# EAGLE board mainfin (EAGLE 7.4.0)
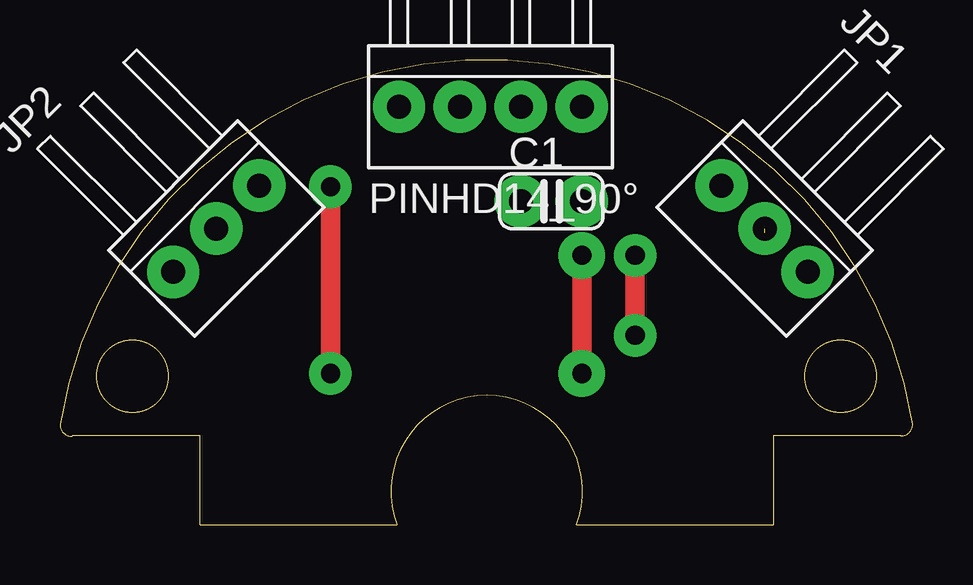
[diagram p0: board, top side]
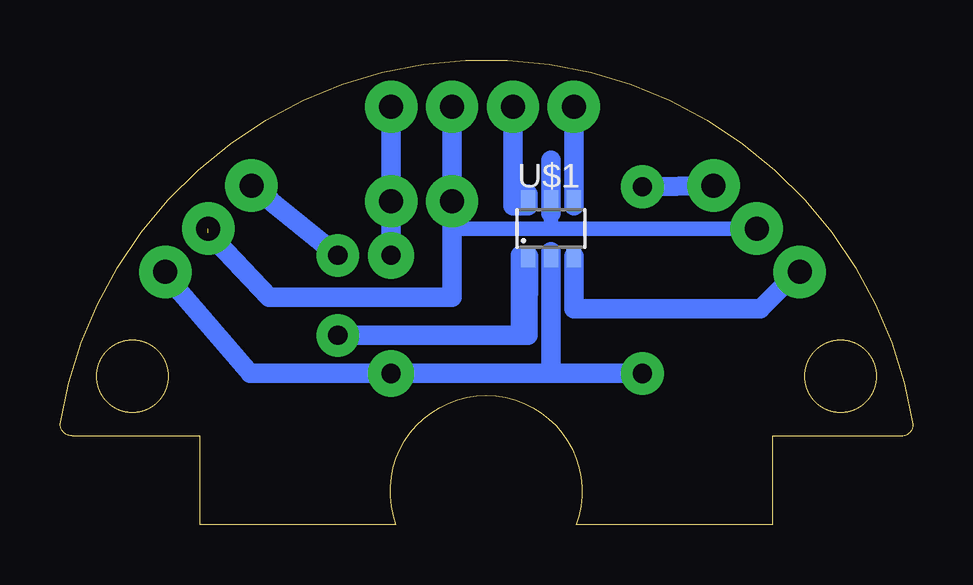
[diagram p1: board, bottom side, seen from below]

Size 35.56 x 19.37 mm. Coordinates in mm from the lower left corner, seen from the top.
Outline: 35.56,4.19 arc162 0,4.19 arc92 0.51,3.7
Outline: 0.51,3.71 5.84,3.71 5.84,0 14.05,0 arc-221 21.54,0 29.74,0 29.74,3.71 35.05,3.71 arc89 35.55,4.19
Outline: circle at 32.54,6.2 radius 1.5
Outline: circle at 3.02,6.2 radius 1.5
Copper layers (1*16): Top 0.035mm / dielectric 1.5mm / Bottom 0.035mm
Design rules "default": minimum track width 10mil, minimum drill 24mil, track to track 8mil, track to pad 8mil, pad to pad 8mil, via to via 8mil, smd to smd 8mil, copper to edge 40mil, drill to drill 8mil, minimum pad ring 10mil, minimum via ring 8mil, stop-mask expansion 4mil, vias tented up to drill 0mil, thermal gap 10mil

## Footprints (pad centres in the part's own frame; a part is rotated, then mirrored left to right if it is on the bottom)
MLCC_25 = drill 1 pad 2.184: 1 -1.27,0; 2 1.27,0
1*3_90 = drill 1 pad 2.184: 1 -2.54,0; 2 0,0; 3 2.54,0
74LVC2G17 = smd 0.6 x 0.9: 1 -0.95,-1.15; 2 0,-1.15; 3 0.95,-1.15; 4 0.95,1.15; 5 0,1.15; 6 -0.95,1.15
1*4_90 = drill 1 pad 2.184: 1 -3.81,0; 2 -1.27,0; 3 1.27,0; 4 3.81,0

## Placement (x,y rotation side)
C1  [MLCC_25]  20.49,13.49 0 top
JP1  [1*3_90]  29.38,12.34 315 top
JP2  [1*3_90]  6.52,12.34 45 top
U$1  74LVC2G17  [74LVC2G17]  15.09,12.34 0 bottom
U$2  PINHD14_90°  [1*4_90]  17.95,17.42 0 top

## Library data of the parts
C1 = rcl__s
JP1 JP2 U$2 = pinhead_s
U$1 = 74LVC2G17

## Nets
+5V: C1.1 JP1.2 JP2.2 U$1.5 U$2.3
GND: C1.2 JP1.3 JP2.3 U$1.2 U$2.4
N$1: U$1.6 U$2.2
N$2: U$1.4 U$2.1
N$3: JP1.1 U$1.1
N$4: JP2.1 U$1.3

## Tracks (layer width: path | path; a pad name or v marks a point on that pad's centre or on a via)
+5V  (1 unrouted)
  Bottom 0.61: JP2.2 15.09,12.34 | U$1.5 15.09,12.98 15.09,12.34 | 15.09,12.34 19.21,12.34 | 19.21,12.34 C1.1 19.21,13.61 | 19.21,12.34 19.21,9.49
  Bottom 0.813: U$2.3 19.21,13.61 19.21,9.49 26.83,9.49 29.38,12.19 | 15.09,12.98 15.09,15.2
GND  (via drill 0.8 pad 1.78, 0.8 pad 1.93)
  Top 0.813: v21.76,6.31 v21.76,11.23 | v11.28,6.31 v11.28,14.09
  Bottom 0.61: 15.09,6.63 U$1.2 15.09,11.39
  Bottom 0.813: v21.76,11.23 C1.2 U$2.4 | v11.28,6.31 15.09,6.31 | 15.09,6.31 v21.76,6.31 27.63,6.31 31.28,10.55 JP1.3 | 15.09,11.39 15.09,6.63 15.09,6.31 | v11.28,14.09 JP2.3
N$1
  Bottom 0.61: U$1.6 16.68,13.46 16.68,13.77
  Bottom 0.813: U$2.2 16.68,13.77 | 16.68,13.77 16.68,13.3 16.04,13.3 16.04,13.77 16.68,13.77
N$2
  Bottom 0.61: U$1.4 U$2.1
  Bottom 0.813: U$2.1 14.13,13.3
N$3  (via drill 0.8 pad 1.78)
  Top 0.813: v23.98,7.9 v23.98,11.23
  Bottom 0.813: U$1.1 16.04,7.9 v23.98,7.9 | v23.98,11.23 JP1.1
N$4
  Bottom 0.813: JP2.1 4.82,10.55 6.36,9.01 14.13,9.01 U$1.3
N$5
  Bottom 0.61: 15.09,13.61 15.09,14.73
N$6
  Bottom 0.813: 26.83,13.61 27.47,14.09
N$10
  Bottom 0.813: 16.36,11.23 16.36,8.22